# EAGLE board Teensy_3_1 XBee Adapter_TearDrops (EAGLE 7.1.0)
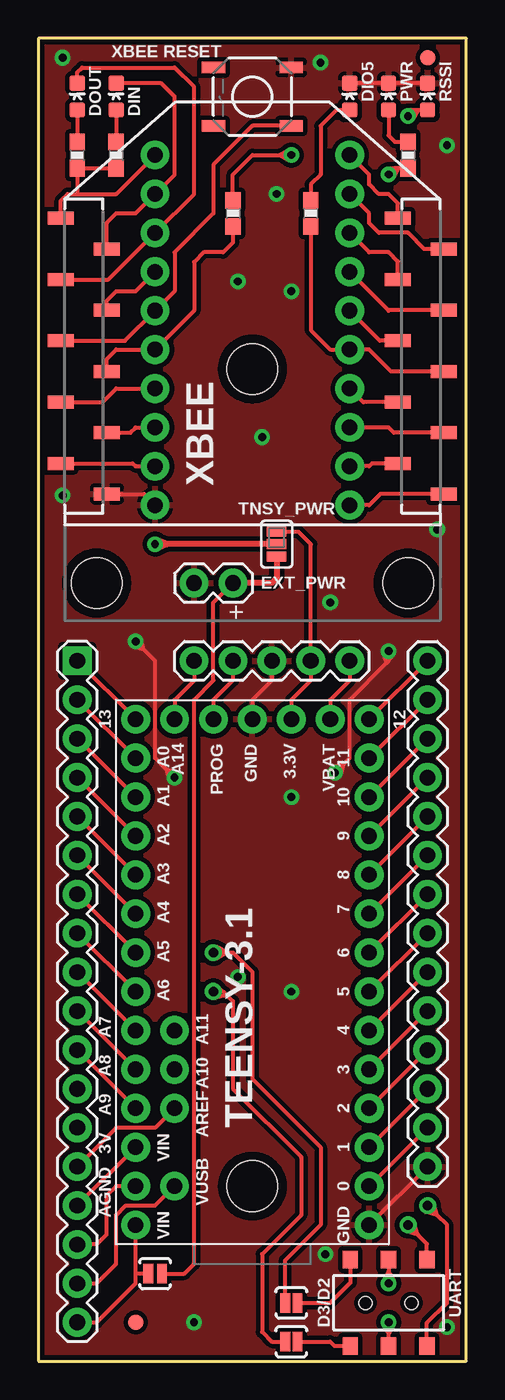
[diagram p0: board, top side]
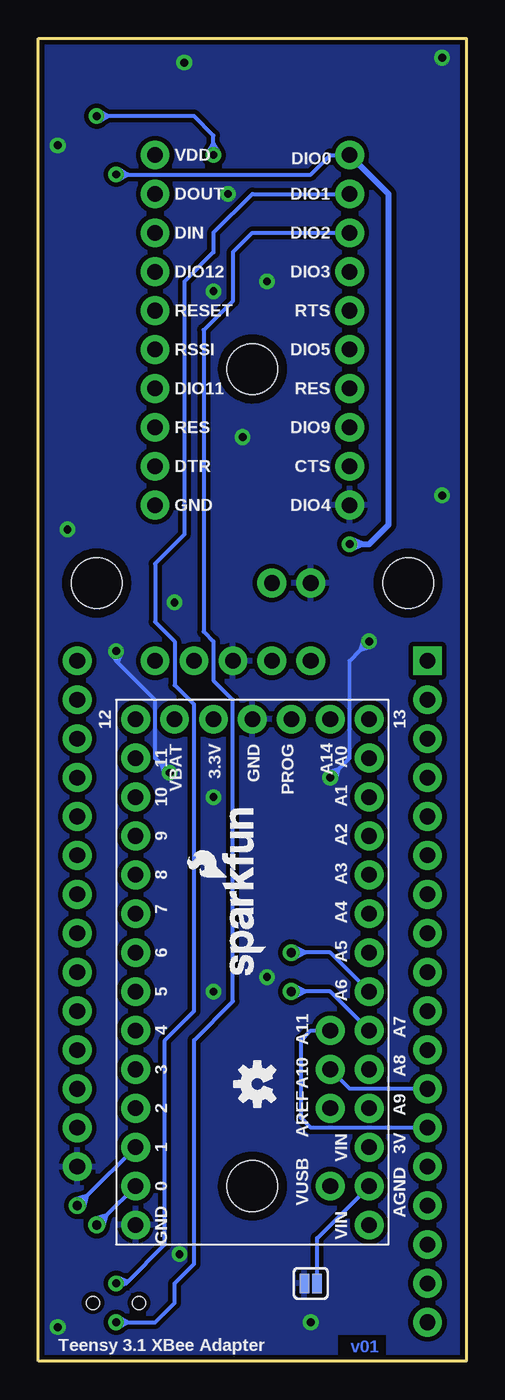
[diagram p1: board, bottom side, seen from below]

Size 27.94 x 86.36 mm. Coordinates in mm from the lower left corner, seen from the top.
Outline: 0,0 27.94,0 27.94,86.36 0,86.36 0,0
Copper layers (1*16): Top 0.035mm / dielectric 1.5mm / Bottom 0.035mm
Design rules "SparkFun-2-layer": minimum track width 7mil, minimum drill 15mil, track to track 8mil, track to pad 8mil, pad to pad 8mil, via to via 8mil, smd to smd 8mil, copper to edge 8mil, drill to drill 8mil, minimum pad ring 12mil, minimum via ring 10mil, stop-mask expansion 4mil, vias tented up to drill 20mil, thermal gap 10mil
Net classes: 0 default: width 0.203 mm; 1 vcc: width 0.254 mm

## Footprints (pad centres in the part's own frame; a part is rotated, then mirrored left to right if it is on the bottom)
1X02 = drill 1.016 pad 1.88: 1 0,0; 2 2.54,0
FIDUCIAL-1X2 = smd 1 x 1: 1 0,0
TEENSY-3.1 = drill 1.016 pad 1.88: 0 16.51,3.81; 1 16.51,6.35; 2 16.51,8.89; 3 16.51,11.43; 3.3V 11.43,34.29; 3V 1.27,6.35; 4 16.51,13.97; 5 16.51,16.51; 6 16.51,19.05; 7 16.51,21.59; 8 16.51,24.13; 9 16.51,26.67; 10 16.51,29.21; 11 16.51,31.75; 12 16.51,34.29; 13 1.27,34.29; 14 1.27,31.75; 15 1.27,29.21; 16 1.27,26.67; 17 1.27,24.13; 18 1.27,21.59; 19 1.27,19.05; 20 1.27,16.51; 21 1.27,13.97; 22 1.27,11.43; 23 1.27,8.89; A10 3.81,11.43; A11 3.81,13.97; A14/DAC 3.81,34.29; AGND 1.27,3.81; AREF 3.81,8.89; GND 8.89,34.29; GND1 16.51,1.27; PROG 6.35,34.29; VBAT 13.97,34.29; VIN 1.27,1.27; VUSB 3.81,3.81
1X10_NO_SILK = drill 1.016 pad 1.88: 1 0,0; 2 2.54,0; 3 5.08,0; 4 7.62,0; 5 10.16,0; 6 12.7,0; 7 15.24,0; 8 17.78,0; 9 20.32,0; 10 22.86,0
1X14 = drill 1.016 pad 1.88: 1 0,0; 2 2.54,0; 3 5.08,0; 4 7.62,0; 5 10.16,0; 6 12.7,0; 7 15.24,0; 8 17.78,0; 9 20.32,0; 10 22.86,0; 11 25.4,0; 12 27.94,0; 13 30.48,0; 14 33.02,0
1X05 = drill 1.016 pad 1.88: 1 0,0; 2 2.54,0; 3 5.08,0; 4 7.62,0; 5 10.16,0
LED-0603 = smd 1 x 1: A 0,-0.877; C 0,0.877
0603-RES = smd 1.1 x 1: 1 -0.85,0; 2 0.85,0
AYZ0202 = smd 1 x 1.15: 1 -2.5,2.825; 2 0,2.825; 3 2.5,2.825; 4 -2.5,-2.825; 5 0,-2.825; 6 2.5,-2.825 | hole 0.85: 1.5,0; -1.5,0
TACTILE_SWITCH_SMD = smd 1.524 x 0.762: 1 -2.54,1.905; 2 2.54,1.905; 3 -2.54,-1.905; 4 2.54,-1.905
PAD-JUMPER-2-NC_BY_PASTE_YES_SILK = smd 0.635 x 1.27: 1 -0.401,0; 2 0.413,0
SJ_2S = smd 0.635 x 1.27: 1 -0.412,0; 2 0.412,0
PAD-JUMPER-3-2OF3_NC_BY_PASTE_YES_SILK_FULL_BOX = smd 0.635 x 1.27: 1 -0.813,0; 2 0,0; 3 0.813,0
PAD-JUMPER-2-NO_YES_SILK = smd 0.635 x 1.27: 1 -0.45,0; 2 0.45,0
STAND-OFF = hole 3.302: 0,0
XBEE-SMD = smd 1.7 x 0.85: 1 -12.5,20; 2 -9.5,18; 3 -12.5,16; 4 -9.5,14; 5 -12.5,12; 6 -9.5,10; 7 -12.5,8; 8 -9.5,6; 9 -12.5,4; 10 -9.5,2; 11 12.5,2; 12 9.5,4; 13 12.5,6; 14 9.5,8; 15 12.5,10; 16 9.5,12; 17 12.5,14; 18 9.5,16; 19 12.5,18; 20 9.5,20
1X18 = drill 1.016 pad 1.88 square: 1 0,0 | drill 1.016 pad 1.88: 2 2.54,0; 3 5.08,0; 4 7.62,0; 5 10.16,0; 6 12.7,0; 7 15.24,0; 8 17.78,0; 9 20.32,0; 10 22.86,0; 11 25.4,0; 12 27.94,0; 13 30.48,0; 14 33.02,0; 15 35.56,0; 16 38.1,0; 17 40.64,0; 18 43.18,0

## Placement (x,y rotation side)
EXT_PWR  M02PTH  [1X02]  10.16,50.8 0 top
FID1  FIDUCIAL1X2  [FIDUCIAL-1X2]  25.4,85.09 0 top
FID2  FIDUCIAL1X2  [FIDUCIAL-1X2]  6.35,2.54 90 top
FRAME1  [CREATIVE_COMMONS]  -6.35,-11.43 0 top  (outside the outline)
JP1  TEENSY-3.1  [TEENSY-3.1]  5.08,7.62 0 top
JP2  M10NO_SILK_PTH_FEMALE  [1X10_NO_SILK]  7.62,55.88 90 top
JP3  M10NO_SILK_PTH_FEMALE  [1X10_NO_SILK]  20.32,55.88 90 top
JP4  M14  [1X14]  25.4,12.7 90 top
JP5  [1X05]  20.32,45.72 180 top
LED1  Red  [LED-0603]  22.86,82.55 0 top
LED2  Red  [LED-0603]  5.08,82.55 0 top
LED3  Green  [LED-0603]  2.54,82.55 0 top
LED4  Green  [LED-0603]  25.4,82.55 0 top
LED5  Green  [LED-0603]  20.32,82.55 0 top
LOGO2  OSHW-LOGOS  [OSHW-LOGO-S]  13.65,18.1 90 bottom
LOGO3  SFE_LOGO_NAME_FLAME.1_INCH  [SFE_LOGO_NAME_FLAME_.1]  13.02,24.77 90 bottom
R1  1k  [0603-RES]  5.08,78.74 90 top
R2  1k  [0603-RES]  17.78,74.93 270 top
R3  1k  [0603-RES]  2.54,78.74 90 top
R4  1k  [0603-RES]  12.7,74.93 270 top
R11  1k  [0603-RES]  24.13,78.74 270 top
S2  SWITCH-DPDTSMD  [AYZ0202]  22.86,3.81 180 top
S3  Reset  [TACTILE_SWITCH_SMD]  13.97,82.55 180 top
SJ1  D_TX  [PAD-JUMPER-2-NC_BY_PASTE_YES_SILK]  16.51,1.27 0 top
SJ2  D_TX  [SJ_2S]  10.16,5.08 180 bottom
SJ3  D_RX  [PAD-JUMPER-2-NC_BY_PASTE_YES_SILK]  16.51,3.81 0 top
SJ4  JUMPER-PAD-3-2OF3_NC_BY_PASTE  [PAD-JUMPER-3-2OF3_NC_BY_PASTE_YES_SILK_FULL_BOX]  15.56,53.34 90 top
SJ5  EXT_JPR  [PAD-JUMPER-2-NO_YES_SILK]  7.62,5.71 0 top
STANDOFF1  STAND-OFF  [STAND-OFF]  24.13,50.8 0 top
STANDOFF2  STAND-OFF  [STAND-OFF]  3.81,50.8 0 top
STANDOFF3  STAND-OFF  [STAND-OFF]  13.97,11.43 0 top
STANDOFF4  STAND-OFF  [STAND-OFF]  13.97,64.77 0 top
U$1  XBEE-1B3  [XBEE-SMD]  13.97,54.61 0 top
U$2  M18_  [1X18]  2.54,45.72 270 top

## Library data of the parts
EXT_PWR JP4 JP5 U$2 = SparkFun-Connectors
FID1 FID2 LOGO2 LOGO3 = SparkFun-Aesthetics
FRAME1 = SparkFun-Aesthetics; DESIGNER: Marshall Taylor; VERSION: v01
JP1 = Testing; SF_ID: DEV-12646
JP2 JP3 = SparkFun-Connectors; PROD_ID: CONN-11563
LED1 LED2 = SparkFun-LED; PROD_ID: DIO-00819
LED3-LED5 = SparkFun-LED; PROD_ID: DIO-00821
R1-R4 R11 = SparkFun-Resistors; PROD_ID: RES-07856
S2 S3 SJ2 = SparkFun
SJ1 SJ3-SJ5 = SparkFun-Passives
STANDOFF1-STANDOFF4 = SparkFun-Electromechanical
U$1 = SparkFun-RF; PROD_ID: CONN-09042

## Nets
2: JP1.2 JP4.4
3: JP1.3 JP4.5
3.3V: JP1.3.3V JP5.2 SJ4.3
3V: JP1.3V U$2.15
4: JP1.4 JP4.6
5: JP1.5 JP4.7
6: JP1.6 JP4.8
7/RX3: JP1.7 JP4.9
8/TX3: JP1.8 JP4.10
9/RX2: JP1.9 JP4.11
10/TX2/CS: JP1.10 JP4.12
11/DOUT: JP1.11 JP4.13
12/DIN: JP1.12 JP4.14
13/SCK: JP1.13 U$2.1
A0/14: JP1.14 U$2.2
A1/15: JP1.15 U$2.3
A2/16: JP1.16 U$2.4
A3/17: JP1.17 U$2.5
A4/18/SDA0: JP1.18 U$2.6
A5/19/SCL0: JP1.19 U$2.7
A6/20: JP1.20 SJ3.1 U$2.8
A7/21: JP1.21 SJ1.1 U$2.9
A8/22: JP1.22 U$2.10
A9/23: JP1.23 U$2.11
A10: JP1.A10 U$2.12
A11: JP1.A11 U$2.13
A14/DAC: JP1.A14/DAC JP5.5
AGND: JP1.AGND SJ2.1 U$2.16
AREF: JP1.AREF U$2.14
CTS: JP3.2 U$1.12
DIO0: JP3.10 U$1.20
DIO1: JP3.9 U$1.19
DIO2: JP3.8 U$1.18
DIO3: JP3.7 U$1.17
DIO4: JP3.1 U$1.11
DIO5: JP3.5 R2.2 U$1.15
DIO9: JP3.3 U$1.13
DIO11: JP2.4 U$1.7
DIO12: JP2.7 U$1.4
DTR: JP2.2 U$1.9
EXT_PWR [vcc]: EXT_PWR.2 SJ4.1 SJ5.2
GND: EXT_PWR.1 JP1.GND JP1.GND1 JP2.1 JP4.1 JP5.3 LED1.C LED4.C LED5.C S3.3 SJ2.2 U$1.10
IN: JP2.8 LED3.C S2.2 U$1.3
N$12: LED1.A R11.1
N$17: LED2.A R1.2
N$19: LED3.A R3.2
N$43: LED4.A R4.1
N$139: LED5.A R2.1
N$140: S2.3 SJ1.2
N$141: S2.6 SJ3.2
OUT: JP2.9 LED2.C S2.5 U$1.2
PROG: JP1.PROG JP5.4
RES: JP2.3 U$1.8
RES2: JP3.4 U$1.14
RESET: JP2.6 S3.1 U$1.5
RSSI: JP2.5 R4.2 U$1.6
RTS: JP3.6 U$1.16
UART_RX: JP1.0 JP4.2 S2.4
UART_TX: JP1.1 JP4.3 S2.1
VBAT: JP1.VBAT JP5.1
VIN: JP1.VIN SJ5.1 U$2.18
VUSB: JP1.VUSB U$2.17
XBEE_VDD: JP2.10 R1.1 R3.1 R11.2 SJ4.2 U$1.1

## Tracks (layer width: path | path; a pad name or v marks a point on that pad's centre or on a via)
2
  Top 0.254: JP4.4 JP1.2
3
  Top 0.254: JP1.3 JP4.5
3.3V
  Top 0.254: SJ4.3 16.97,54.15 17.78,53.34 JP5.2 17.78,44.45 16.51,43.18 JP1.3.3V
3V
  Top 0.254: JP1.3V U$2.15
4
  Top 0.254: JP4.6 JP1.4
5
  Top 0.254: JP4.7 JP1.5
6
  Top 0.254: JP4.8 JP1.6
7/RX3
  Top 0.254: JP4.9 JP1.7
8/TX3
  Top 0.254: JP4.10 JP1.8
9/RX2
  Top 0.254: JP4.11 JP1.9
10/TX2/CS
  Top 0.254: JP4.12 JP1.10
11/DOUT
  Top 0.254: JP4.13 JP1.11
12/DIN
  Top 0.254: JP4.14 JP1.12
13/SCK
  Top 0.254: JP1.13 U$2.1
A0/14
  Top 0.254: JP1.14 U$2.2
A1/15
  Top 0.254: JP1.15 U$2.3
A2/16
  Top 0.254: JP1.16 U$2.4
A3/17
  Top 0.254: JP1.17 U$2.5
A4/18/SDA0
  Top 0.254: JP1.18 U$2.6
A5/19/SCL0
  Top 0.254: JP1.19 U$2.7
A6/20  (via drill 0.6)
  Top 0.254: JP1.20 U$2.8 | v11.43,26.67 12.33,26.67 | 12.33,26.67 12.7,26.67 13.97,25.4 13.97,18.41 18.41,13.97 18.41,8.89 16.11,6.58 SJ3.1 | 12.33,26.67 11.63,27.05 v11.43,26.67 | 12.33,26.67 11.63,26.29 v11.43,26.67
  Bottom 0.254: JP1.20 8.89,26.67 10.53,26.67 | 10.53,26.67 v11.43,26.67 | 10.53,26.67 11.23,26.29 v11.43,26.67 | 10.53,26.67 11.23,27.05 v11.43,26.67
A7/21  (via drill 0.6)
  Top 0.254: JP1.21 U$2.9 | v11.43,24.13 12.06,24.13 12.3,23.9 | 12.3,23.9 12.7,23.5 12.7,17.78 17.14,13.34 17.14,9.53 14.61,6.99 14.61,1.91 15.24,1.27 SJ1.1 | 12.3,23.9 11.72,24.44 v11.43,24.13 | 12.3,23.9 11.53,23.71 v11.43,24.13
  Bottom 0.254: JP1.21 8.89,24.13 10.53,24.13 | 10.53,24.13 v11.43,24.13 | 10.53,24.13 11.23,23.75 v11.43,24.13 | 10.53,24.13 11.23,24.51 v11.43,24.13
A8/22
  Top 0.254: JP1.22 U$2.10
A9/23
  Top 0.254: JP1.23 U$2.11
A10
  Bottom 0.254: U$2.12 7.62,17.78 JP1.A10
A11
  Bottom 0.254: U$2.13 10.16,15.24 10.79,15.88 10.79,20.95 10.16,21.59 JP1.A11
A14/DAC
  Top 0.254: JP5.5 10.16,44.45 8.89,43.18 JP1.A14/DAC
AGND
  Top 0.254: JP1.AGND 5.08,11.43 4.45,10.79 4.45,8.26 3.81,7.62 U$2.16
  Bottom 0.254: SJ2.1 9.75,8.03 JP1.AGND
AREF
  Top 0.254: JP1.AREF 7.62,15.24 5.08,15.24 U$2.14
CTS
  Top 0.254: U$1.12 21.78,58.61 21.59,58.42 JP3.2
DIO0
  Top 0.254: U$1.20 23.47,75.59 22.86,76.2 22.23,76.2 21.59,76.83 21.59,77.47 JP3.10
DIO1
  Top 0.254: U$1.19 25.18,72.61 24.13,73.66 22.23,73.66 21.59,74.3 21.59,74.93 JP3.9
DIO2
  Top 0.254: U$1.18 23.47,71.78 22.86,72.39 21.59,72.39 JP3.8
DIO3
  Top 0.254: U$1.17 22.89,68.61 22.86,68.58 JP3.7
DIO4
  Top 0.254: U$1.11 22.32,56.61 21.59,55.88 JP3.1
DIO5
  Top 0.254: U$1.15 23.02,64.61 21.59,66.04 JP3.5 19.05,66.04 17.78,67.31 R2.2
DIO9
  Top 0.254: U$1.13 23.21,60.61 22.86,60.96 JP3.3
DIO11
  Top 0.254: U$1.7 4.19,62.61 5.08,63.5 JP2.4
DIO12
  Top 0.254: U$1.4 4.47,69.24 5.08,69.85 6.35,69.85 JP2.7
DTR
  Top 0.254: U$1.9 6.16,58.61 6.35,58.42 JP2.2
EXT_PWR
  Top 0.254: EXT_PWR.2 11.43,49.53 11.43,44.45 10.16,43.18 10.16,6.35 9.53,5.71 SJ5.2
  Top 0.406: SJ4.1 15.56,51.12 15.24,50.8 EXT_PWR.2
GND  (via drill 0.51)
  Top 0.254: U$1.10 6.89,56.61 JP2.1 | JP4.1 JP1.GND1 | LED4.C LED1.C LED5.C | JP5.3 15.24,44.45 13.97,43.18 JP1.GND | v8.89,38.1 8.35,38.64 | 8.35,38.64 7.62,39.37 7.62,45.72 6.89,46.45 | v6.35,46.99 6.89,46.45 | v19.37,38.42 19.91,38.96 | 19.91,38.96 20.32,39.37 20.32,43.18 22.74,45.6 | 22.74,45.6 22.86,45.72 v22.86,46.35 | 8.35,38.64 8.52,38 v8.89,38.1 | 8.35,38.64 8.99,38.47 v8.89,38.1 | 6.89,46.45 6.72,47.09 v6.35,46.99 | 6.89,46.45 6.25,46.62 v6.35,46.99 | 19.91,38.96 19.27,38.79 v19.37,38.42 | 19.91,38.96 19.74,38.32 v19.37,38.42 | 22.74,45.6 23.16,46.12 v22.86,46.35 | 22.74,45.6 22.5,46.22 v22.86,46.35
  Bottom 0.254: 22.74,45.6 20.32,43.18 20.32,39.37 19.91,38.96 | 22.74,45.6 22.86,45.72 v22.86,46.35 | 8.35,38.64 7.62,39.37 7.62,45.72 6.89,46.45 | 8.35,38.64 v8.89,38.1 | 6.89,46.45 v6.35,46.99 | 19.91,38.96 v19.37,38.42 | 8.35,38.64 8.52,38 v8.89,38.1 | 8.35,38.64 8.99,38.47 v8.89,38.1 | 6.89,46.45 6.72,47.09 v6.35,46.99 | 6.89,46.45 6.25,46.62 v6.35,46.99 | 19.91,38.96 19.27,38.79 v19.37,38.42 | 19.91,38.96 19.74,38.32 v19.37,38.42 | 22.74,45.6 23.16,46.12 v22.86,46.35 | 22.74,45.6 22.5,46.22 v22.86,46.35
  other vias: 18.73,6.99 16.51,24.13 16.51,36.83 1.59,85.09 18.41,84.77 26.67,79.38 1.59,56.52 26.04,54.29 15.56,76.2 13.02,70.48 14.61,60.33 26.67,2.22 10.16,2.54 19.05,49.53 16.51,69.85 13.02,25.08
  pour Top (isolate 0.305): 0,86.36 27.94,86.36 27.94,0 0,0
  pour Bottom (isolate 0.305): 0,86.36 27.94,86.36 27.94,0 8.57,0 8.57,1.91 5.08,1.91 5.08,0 0,0
IN  (via drill 0.51 pad 0.51)
  Top 0.254: U$1.3 4.57,70.61 JP2.8 10.16,76.2 10.16,83.19 8.89,84.45 2.86,84.45 2.54,84.14 LED3.C | S2.2 22.86,1.78 | 22.86,1.78 v22.86,2.54 | 22.86,1.78 23.19,2.35 v22.86,2.54 | 22.86,1.78 22.53,2.35 v22.86,2.54
  Bottom 0.254: v22.86,2.54 22.1,2.54 | 22.1,2.54 20.32,2.54 19.05,3.81 19.05,5.08 17.78,6.35 17.78,20.95 15.24,23.5 15.24,43.18 16.51,44.45 16.51,46.99 17.14,47.62 17.14,67.31 15.24,69.22 15.24,72.39 13.97,73.66 JP2.8 | 22.1,2.54 22.67,2.21 v22.86,2.54 | 22.1,2.54 22.67,2.87 v22.86,2.54
N$12
  Top 0.254: LED1.A 22.86,80.01 23.28,79.59 R11.1
N$17
  Top 0.254: LED2.A R1.2
N$19
  Top 0.254: LED3.A R3.2
N$43  (via drill 0.51 pad 0.51)
  Top 0.254: R4.1 12.7,77.47 13.97,78.74 15.75,78.74 | 15.75,78.74 v16.51,78.74 | v24.13,81.28 24.45,81.6 | LED4.A 24.78,81.67 | 24.78,81.67 24.52,81.67 v24.13,81.28 | 15.75,78.74 16.32,78.41 v16.51,78.74 | 15.75,78.74 16.32,79.07 v16.51,78.74 | 24.78,81.67 24.12,81.66 v24.13,81.28 | 24.78,81.67 24.46,81.1 v24.13,81.28
  Bottom 0.254: v16.51,78.74 16.51,79.5 | 16.51,79.5 16.51,80.01 17.78,81.28 23.37,81.28 | 23.37,81.28 v24.13,81.28 | 16.51,79.5 16.18,78.93 v16.51,78.74 | 16.51,79.5 16.84,78.93 v16.51,78.74 | 23.37,81.28 23.94,80.95 v24.13,81.28 | 23.37,81.28 23.94,81.61 v24.13,81.28
N$139
  Top 0.254: LED5.A 19.44,81.67 18.41,80.64 18.41,77.47 17.78,76.83 R2.1
N$140
  Top 0.254: SJ1.2 19.05,1.27 19.34,0.98 S2.3
N$141
  Top 0.254: SJ3.2 19.05,3.81 20.36,5.12 S2.6
OUT  (via drill 0.51 pad 0.51)
  Top 0.254: U$1.2 4.47,74.32 5.08,74.93 6.35,74.93 JP2.9 8.89,77.47 8.89,82.55 8.01,83.43 LED2.C | S2.5 22.86,5.84 | 22.86,5.84 v22.86,5.08 | 22.86,5.84 22.53,5.27 v22.86,5.08 | 22.86,5.84 23.19,5.27 v22.86,5.08
  Bottom 0.254: v22.86,5.08 22.23,5.08 22.11,5.2 | 22.11,5.2 19.68,7.62 19.68,20.95 17.78,22.86 17.78,42.86 19.05,44.13 19.05,46.99 20.32,48.26 20.32,52.07 18.41,53.98 18.41,70.48 16.51,72.39 16.51,73.66 13.97,76.2 JP2.9 | 22.11,5.2 22.62,4.78 v22.86,5.08 | 22.11,5.2 22.72,5.43 v22.86,5.08
PROG
  Top 0.254: JP5.4 12.7,44.45 11.43,43.18 JP1.PROG
RES
  Top 0.254: U$1.8 6,60.61 6.35,60.96 JP2.3
RES2
  Top 0.254: U$1.14 21.21,62.61 JP3.4
RESET
  Top 0.254: U$1.5 5.65,66.61 JP2.6 8.89,69.85 8.89,72.39 11.43,74.93 11.43,78.11 13.97,80.64 S3.1
RSSI
  Top 0.254: U$1.6 4.47,65.43 5.08,66.04 JP2.5 10.16,68.58 10.16,71.75 10.79,72.39 12.06,72.39 12.7,73.03 R4.2
RTS
  Top 0.254: U$1.16 22.29,66.61 JP3.6
UART_RX  (via drill 0.6 pad 0.51)
  Top 0.254: JP4.2 JP1.0 | S2.4 25.36,7.66 24.77,8.25 | 24.77,8.25 v24.13,8.89 | 24.77,8.25 24.54,9.01 v24.13,8.89 | 24.77,8.25 24.01,8.48 v24.13,8.89
  Bottom 0.254: v24.13,8.89 23.49,9.53 | 23.49,9.53 JP1.0 | 23.49,9.53 23.72,8.77 v24.13,8.89 | 23.49,9.53 24.25,9.3 v24.13,8.89
UART_TX  (via drill 0.6 pad 0.51)
  Top 0.254: JP4.3 JP1.1 | S2.1 25.36,2.5 26.67,3.81 26.67,8.89 26.04,9.52 | 26.04,9.52 v25.4,10.16 | 26.04,9.52 25.81,10.28 v25.4,10.16 | 26.04,9.52 25.28,9.75 v25.4,10.16
  Bottom 0.254: v25.4,10.16 24.76,10.8 | 24.76,10.8 JP1.1 | 24.76,10.8 24.99,10.04 v25.4,10.16 | 24.76,10.8 25.52,10.57 v25.4,10.16
VBAT
  Top 0.254: JP5.1 20.32,44.45 19.05,43.18 JP1.VBAT
VIN
  Top 0.254: U$2.18 3.81,2.54 6.35,5.08 6.35,5.71 | 6.35,5.71 JP1.VIN | SJ5.1 6.35,5.71
VUSB
  Top 0.254: U$2.17 3.81,5.08 5.08,6.35 5.08,9.53 5.71,10.16 7.62,10.16 JP1.VUSB
XBEE_VDD  (via drill 0.51 pad 0.51)
  Top 0.254: U$1.1 1.47,75.77 1.91,76.2 2.54,76.2 | 2.54,76.2 5.08,76.2 JP2.10 | R11.2 23.5,77.89 | 23.5,77.89 23.28,77.89 v22.86,77.47 | R1.1 R3.1 2.54,76.2 | 23.5,77.89 22.84,77.85 v22.86,77.47 | 23.5,77.89 23.2,77.3 v22.86,77.47
  Top 0.406: SJ4.2 8.38,53.34 | 8.38,53.34 v7.62,53.34 | 8.38,53.34 7.74,53.62 v7.62,53.34 | 8.38,53.34 7.74,53.06 v7.62,53.34
  Bottom 0.254: v22.86,77.47 22.1,77.47 | 22.1,77.47 10.16,77.47 8.89,78.74 JP2.10 | 22.1,77.47 22.67,77.14 v22.86,77.47 | 22.1,77.47 22.67,77.8 v22.86,77.47
  Bottom 0.406: v7.62,53.34 6.86,53.34 | 6.86,53.34 6.35,53.34 5.08,54.61 5.08,76.2 JP2.10 | 6.86,53.34 7.5,53.06 v7.62,53.34 | 6.86,53.34 7.5,53.62 v7.62,53.34

## Text on the board
Bottom: v01
tPlace: XBEE RESET | DIO5 | PWR | RSSI | DOUT | DIN | XBEE | TNSY_PWR | + | UART | D3/D2
bPlace: VDD | DIO0 | DIO1 | DOUT | DIO2 | DIN | DIO3 | DIO12 | RTS | RESET | DIO5 | RSSI | RES | DIO11 | DIO9 | RES | CTS | DTR | DIO4 | GND | Teensy 3.1 XBee Adapter